# EAGLE board detector (EAGLE 5.10)
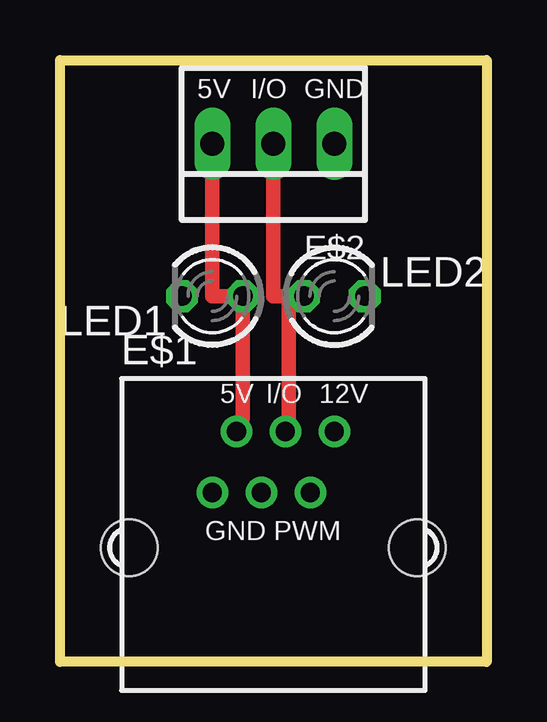
[diagram p0: board, top side]
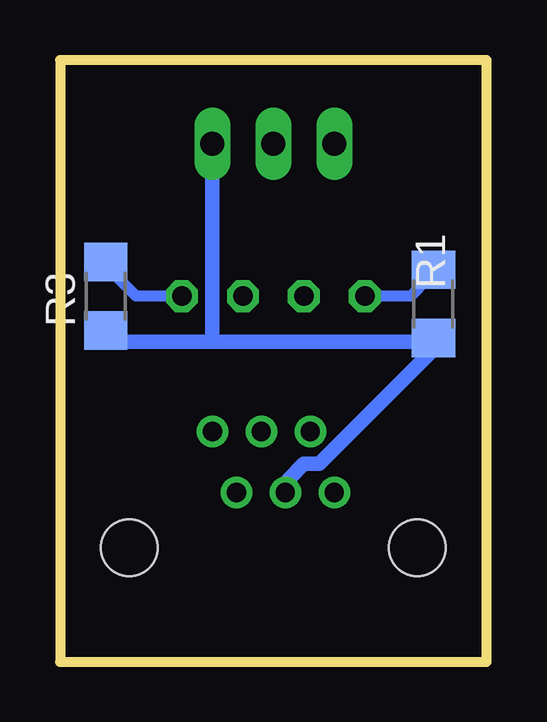
[diagram p1: board, bottom side, seen from below]

Size 17.78 x 25.08 mm. Coordinates in mm from the lower left corner, seen from the top.
Outline: 0,25.08 17.78,25.08 17.78,0 0,0 0,25.08
Copper layers (1*16): Top 0.035mm / dielectric 1.5mm / Bottom 0.035mm
Design rules "default": minimum track width 10mil, minimum drill 24mil, track to track 8mil, track to pad 8mil, pad to pad 8mil, via to via 8mil, smd to smd 8mil, copper to edge 40mil, drill to drill 8mil, minimum pad ring 10mil, minimum via ring 8mil, stop-mask expansion 4mil, vias tented up to drill 0mil, thermal gap 10mil
Net classes: 0 default: width 0.457 mm; 1 power: width 0.61 mm
Milling: 4 lines

## Footprints (pad centres in the part's own frame; a part is rotated, then mirrored left to right if it is on the bottom)
YH-55-10 = drill 0.8 pad 1.3 round: 1 -2.54,2.3; 2 -1.54,4.84; 3 -0.5,2.3; 4 0.5,4.84; 5 1.54,2.3; 6 2.54,4.84 | hole 2.36: -6,0; 6,0
22-23-2031 = drill 1 long: 1 -2.54,0; 2 0,0; 3 2.54,0
LED3MM = drill 0.813 octagon: A -1.27,0; K 1.27,0
R1206 = smd 1.6 x 1.803: 1 -1.422,0; 2 1.422,0

## Placement (x,y rotation side)
E$1  [YH-55-10]  8.89,4.76 0 top
E$2  [22-23-2031]  8.89,21.59 180 top
LED1  [LED3MM]  6.35,15.24 180 top
LED2  [LED3MM]  11.43,15.24 0 top
R1  1K  [R1206]  2.22,14.92 90 bottom
R3  1K  [R1206]  15.88,15.24 90 bottom

## Library data of the parts
E$1 = lpatiny
E$2 = con-molex
LED1 LED2 = led
R1 R3 = smd-ipc

## Nets
S$1 [power]: E$1.3 E$2.1 R1.1 R3.1
S$2: LED1.K R1.2
S$3 [power]: E$1.2 E$2.3 LED1.A
S$5 [power]: E$1.4 E$2.2 LED2.A
S$6 [power]: E$1.5
S$8: LED2.K R3.2

## Tracks (layer width: path | path; a pad name or v marks a point on that pad's centre or on a via)
S$1
  Bottom 0.61: 11.43,13.34 15.88,13.34 R3.1 | 11.43,13.34 2.54,13.34 R1.1 1.9,13.34 6.99,8.26 7.62,8.26 8.26,7.62 E$1.3 | 11.43,13.34 E$2.1
S$2
  Bottom 0.457: LED1.K 3.18,15.24 2.54,15.88 R1.2
S$3
  Top 0.61: E$1.2 7.62,10.16 LED1.A 6.35,15.24 E$2.3
S$5
  Top 0.61: 9.53,15.24 9.53,10.16 E$1.4 | E$2.2 8.89,15.24 9.53,15.24 | 9.53,15.24 LED2.A
S$8
  Bottom 0.457: LED2.K 14.61,15.24 15.88,16.51 R3.2

## Text on the board
tPlace: 5V | I/O | GND